# EAGLE board mosfet-drv-for-draft (EAGLE 6.5.0)

Size 100 x 80 mm. Coordinates in mm from the lower left corner, seen from the top.
Outline: 0,0 100,0 100,80 0,80 0,0
Copper layers (1*16): Top 0.035mm / dielectric 1.5mm / Bottom 0.035mm
Design rules "default": minimum track width 10mil, minimum drill 32mil, track to track 16mil, track to pad 16mil, pad to pad 16mil, via to via 16mil, smd to smd 12mil, copper to edge 40mil, drill to drill 40mil, minimum pad ring 25mil, minimum via ring 12mil, stop-mask expansion 4mil, vias tented up to drill 0mil, thermal gap 10mil

## Footprints (pad centres in the part's own frame; a part is rotated, then mirrored left to right if it is on the bottom)
C025-060X050 = drill 0.813 octagon: 1 -1.27,0; 2 1.27,0
78XXS = drill 1.016 long: GND 0,-2.54; IN -2.54,-2.54; OUT 2.54,-2.54
DIL08 = drill 0.8 pad 1.4: 1 -3.81,-3.81; 2 -1.27,-3.81; 3 1.27,-3.81; 4 3.81,-3.81; 5 3.81,3.81; 6 1.27,3.81; 7 -1.27,3.81; 8 -3.81,3.81
1X01 = drill 1.5 long: 1 0,0
2X08 = drill 1.016 octagon: 1 -8.89,-1.27; 2 -8.89,1.27; 3 -6.35,-1.27; 4 -6.35,1.27; 5 -3.81,-1.27; 6 -3.81,1.27; 7 -1.27,-1.27; 8 -1.27,1.27; 9 1.27,-1.27; 10 1.27,1.27; 11 3.81,-1.27; 12 3.81,1.27; 13 6.35,-1.27; 14 6.35,1.27; 15 8.89,-1.27; 16 8.89,1.27
DIL08' = drill 0.813 offset: 1 -3.81,-3.81; 2 -1.27,-3.81; 3 1.27,-3.81; 4 3.81,-3.81; 5 3.81,3.81; 6 1.27,3.81; 7 -1.27,3.81; 8 -3.81,3.81
DIL06 = drill 0.813 offset: 1 -2.54,-3.81; 2 0,-3.81; 3 2.54,-3.81; 4 2.54,3.81; 5 0,3.81; 6 -2.54,3.81
TO220BH = drill 1.118 long: D 0,-6.35; G -2.54,-6.35; S 2.54,-6.35 | hole 3.302: 0,11.176
M1206 = smd 1.6 x 2: 1 -1.4,0; 2 1.4,0
0207/15 = drill 0.813 octagon: 1 -7.62,0; 2 7.62,0

## Placement (x,y rotation side)
C78-IN1  [C025-060X050]  -64.77,66.04 0 top  (outside the outline)
C78-IN2  [C025-060X050]  -73.66,66.04 0 top  (outside the outline)
C78-OUT1  [C025-060X050]  -45.72,66.04 0 top  (outside the outline)
C78-OUT2  [C025-060X050]  -55.88,66.04 0 top  (outside the outline)
IC7805  [78XXS]  -82.55,69.85 0 top  (outside the outline)
ICD1  IR4427  [DIL08]  77.47,31.75 180 top
ICD2  IR4427  [DIL08]  77.47,48.26 0 top
ICD-3-4  IR4427  [DIL08]  35.56,34.29 180 top
ICD-5-6  IR4427  [DIL08]  15.24,33.02 270 top
ICD-7-8  IR4427  [DIL08]  27.94,49.53 90 top
JP_CH1  [1X01]  99.06,2.54 270 top
JP_CH2  [1X01]  96.52,77.47 0 top
JP_CH3  [1X01]  35.56,1.27 0 top
JP_CH4  [1X01]  21.59,1.27 0 top
JP_CH5  [1X01]  7.62,1.27 0 top
JP_CH6  [1X01]  12.7,77.47 0 top
JP_CH7  [1X01]  26.67,77.47 0 top
JP_CH8  [1X01]  40.64,77.47 0 top
JP_MC  [2X08]  -99.06,66.04 0 top  (outside the outline)
JP_PWR_GND  [1X01]  -25.4,74.93 0 top  (outside the outline)
JP_PWR_VCC  [1X01]  -40.64,74.93 0 top  (outside the outline)
OPTO1  6N137  [DIL08']  92.71,33.02 270 top
OPTO2  6N137  [DIL08']  92.71,46.99 90 top
OPTO3  4N25M  [DIL06]  -17.78,55.88 0 top  (outside the outline)
OPTO4  4N25M  [DIL06]  -27.94,55.88 0 top  (outside the outline)
OPTO5  4N25M  [DIL06]  -38.1,55.88 0 top  (outside the outline)
OPTO6  4N25M  [DIL06]  -48.26,55.88 0 top  (outside the outline)
OPTO7  4N25M  [DIL06]  -58.42,55.88 0 top  (outside the outline)
OPTO8  4N25M  [DIL06]  -68.58,55.88 0 top  (outside the outline)
Q1  IRLZ44Z  [TO220BH]  21.59,2.54 180 top
Q1-1  IRLZ44Z  [TO220BH]  91.44,2.54 180 top
Q1-2  IRLZ44Z  [TO220BH]  77.47,2.54 180 top
Q1-3  IRLZ44Z  [TO220BH]  63.5,2.54 180 top
Q1-4  IRLZ44Z  [TO220BH]  49.53,2.54 180 top
Q2  IRLZ44Z  [TO220BH]  7.62,2.54 180 top
Q2-1  IRLZ44Z  [TO220BH]  96.52,77.47 0 top
Q2-2  IRLZ44Z  [TO220BH]  82.55,77.47 0 top
Q2-3  IRLZ44Z  [TO220BH]  68.58,77.47 0 top
Q2-4  IRLZ44Z  [TO220BH]  54.61,77.47 0 top
Q3  IRLZ44Z  [TO220BH]  35.56,2.54 180 top
Q4  IRLZ44Z  [TO220BH]  12.7,77.47 0 top
Q5  IRLZ44Z  [TO220BH]  26.67,77.47 0 top
Q6  IRLZ44Z  [TO220BH]  40.64,77.47 0 top
R-MC1  [M1206]  67.31,40.64 180 bottom
R-MC2  [M1206]  -49.53,80.01 0 top  (outside the outline)
R-MC3  [M1206]  -67.31,80.01 0 top  (outside the outline)
R-MC4  [M1206]  -85.09,80.01 0 top  (outside the outline)
R-MC5  [M1206]  -102.87,80.01 0 top  (outside the outline)
R-MC6  [M1206]  -21.59,85.09 0 top  (outside the outline)
R-MC7  [M1206]  -39.37,85.09 0 top  (outside the outline)
R-MC8  [M1206]  -57.15,85.09 0 top  (outside the outline)
RG1-1  [0207/15]  99.06,16.51 270 top
RG1-2  [0207/15]  96.52,16.51 270 top
RG1-3  [0207/15]  85.09,16.51 270 top
RG1-4  [0207/15]  82.55,16.51 270 top
RG1-5  [0207/15]  71.12,16.51 270 top
RG1-6  [0207/15]  68.58,16.51 270 top
RG1-7  [0207/15]  57.15,16.51 270 top
RG1-8  [0207/15]  54.61,16.51 270 top
RG2-1  [0207/15]  88.9,63.5 90 top
RG2-2  [0207/15]  91.44,63.5 90 top
RG2-3  [0207/15]  77.47,63.5 90 top
RG2-4  [0207/15]  74.93,63.5 90 top
RG2-5  [0207/15]  63.5,63.5 90 top
RG2-6  [0207/15]  60.96,63.5 90 top
RG2-7  [0207/15]  49.53,63.5 90 top
RG2-8  [0207/15]  46.99,63.5 90 top
RG3-1  [0207/15]  40.64,16.51 270 top
RG3-2  [0207/15]  43.18,16.51 270 top
RG4-1  [0207/15]  29.21,16.51 270 top
RG4-2  [0207/15]  26.67,16.51 270 top
RG5-1  [0207/15]  12.7,16.51 270 top
RG5-2  [0207/15]  15.24,16.51 270 top
RG6-1  [0207/15]  5.08,63.5 90 top
RG6-2  [0207/15]  7.62,63.5 90 top
RG7-1  [0207/15]  19.05,63.5 90 top
RG7-2  [0207/15]  21.59,63.5 90 top
RG8-1  [0207/15]  35.56,63.5 90 top
RG8-2  [0207/15]  33.02,63.5 90 top
RO1  [M1206]  -39.37,110.49 0 top  (outside the outline)
RO2  [M1206]  -57.15,110.49 0 top  (outside the outline)
RO3  [M1206]  -74.93,110.49 0 top  (outside the outline)
RO4  [M1206]  -92.71,110.49 0 top  (outside the outline)
RO5  [M1206]  -110.49,110.49 0 top  (outside the outline)
RO6  [M1206]  -21.59,115.57 0 top  (outside the outline)
RO7  [M1206]  -39.37,115.57 0 top  (outside the outline)
RO8  [M1206]  -57.15,115.57 0 top  (outside the outline)

## Library data of the parts
C78-IN1 C78-IN2 C78-OUT1 C78-OUT2 R-MC1-R-MC8 RG1-1-RG1-8 RG2-1-RG2-8 RG3-1 RG3-2 RG4-1 RG4-2 RG5-1 RG5-2 RG6-1 RG6-2 RG7-1 RG7-2 RG8-1 RG8-2 RO1-RO8 = rcl
IC7805 = v-reg
ICD1 ICD2 ICD-3-4 ICD-5-6 ICD-7-8 = ir; MF: INTERNATIONAL RECTIFIER(IR); MPN: IR4427; OC_FARNELL: 1023267; OC_NEWARK: 27C6914
JP_CH1-JP_CH8 JP_PWR_GND JP_PWR_VCC = dbg-misc
JP_MC = pinhead
OPTO1 OPTO2 = optocoupler; MPN: 6N137; OC_FARNELL: 1328376; OC_NEWARK: 52M1895
OPTO3-OPTO8 = optocoupler; MPN: 4N25-M; OC_FARNELL: 1021349; OC_NEWARK: 98K9084
Q1 Q1-1-Q1-4 Q2 Q2-1-Q2-4 Q3-Q6 = transistor-power

## Nets
N$1: C78-IN1.2 C78-IN2.2 C78-OUT1.2 C78-OUT2.2 IC7805.GND ICD1.3 ICD2.3 ICD-3-4.3 ICD-5-6.3 ICD-7-8.3 JP_PWR_GND.1 OPTO1.5 OPTO2.5 OPTO3.4 OPTO4.4 OPTO5.4 OPTO6.4 OPTO7.4 OPTO8.4 Q1-1.S Q1-2.S Q1-3.S Q1-4.S Q1.S Q2-1.S Q2-2.S Q2-3.S Q2-4.S Q2.S Q3.S Q4.S Q5.S Q6.S
N$2: C78-IN1.1 C78-IN2.1 IC7805.IN ICD1.6 ICD2.6 ICD-3-4.6 ICD-5-6.6 ICD-7-8.6 JP_PWR_VCC.1
N$3: C78-OUT1.1 C78-OUT2.1 IC7805.OUT OPTO1.8 OPTO2.8 RO1.2 RO2.2 RO3.2 RO4.2 RO5.2 RO6.2 RO7.2 RO8.2
N$4: OPTO1.2 R-MC1.2
N$5: OPTO2.2 R-MC2.2
N$6: OPTO3.1 R-MC3.2
N$7: OPTO4.1 R-MC4.2
N$8: OPTO5.1 R-MC5.2
N$9: OPTO6.1 R-MC6.2
N$10: OPTO7.1 R-MC7.2
N$11: OPTO8.1 R-MC8.2
N$12: JP_MC.2 R-MC1.1
N$13: JP_MC.4 R-MC2.1
N$14: JP_MC.6 R-MC3.1
N$15: JP_MC.8 R-MC4.1
N$16: JP_MC.10 R-MC5.1
N$17: JP_MC.12 R-MC6.1
N$18: JP_MC.14 R-MC7.1
N$19: JP_MC.16 R-MC8.1
N$20: ICD1.2 ICD1.4 OPTO1.6 RO1.1
N$21: JP_MC.15 OPTO1.3 OPTO2.3 OPTO3.2 OPTO4.2 OPTO5.2 OPTO6.2 OPTO7.2 OPTO8.2
N$22: ICD2.2 ICD2.4 OPTO2.6 RO2.1
N$23: ICD-3-4.2 OPTO3.6 RO3.1
N$24: ICD-3-4.4 OPTO4.6 RO4.1
N$25: ICD-5-6.2 OPTO5.6 RO5.1
N$26: ICD-5-6.4 OPTO6.6 RO6.1
N$27: ICD-7-8.2 OPTO7.6 RO7.1
N$28: ICD-7-8.4 OPTO8.6 RO8.1
N$29: Q1-1.G RG1-1.2 RG1-2.2
N$30: ICD1.5 ICD1.7 RG1-1.1 RG1-2.1 RG1-3.1 RG1-4.1 RG1-5.1 RG1-6.1 RG1-7.1 RG1-8.1
N$31: Q1-2.G RG1-3.2 RG1-4.2
N$32: Q1-3.G RG1-5.2 RG1-6.2
N$33: Q1-4.G RG1-7.2 RG1-8.2
N$34: Q2-1.G RG2-1.2 RG2-2.2
N$35: JP_CH1.1 Q1-1.D Q1-2.D Q1-3.D Q1-4.D
N$37: ICD2.5 ICD2.7 RG2-1.1 RG2-2.1 RG2-3.1 RG2-4.1 RG2-5.1 RG2-6.1 RG2-7.1 RG2-8.1
N$38: Q2-2.G RG2-3.2 RG2-4.2
N$39: Q2-3.G RG2-5.2 RG2-6.2
N$40: Q2-4.G RG2-7.2 RG2-8.2
N$41: JP_CH2.1 Q2-1.D Q2-2.D Q2-3.D Q2-4.D
N$42: JP_CH3.1 Q3.D
N$43: ICD-3-4.7 RG3-1.1 RG3-2.1
N$44: Q3.G RG3-1.2 RG3-2.2
N$45: ICD-3-4.5 RG4-1.1 RG4-2.1
N$46: Q1.G RG4-1.2 RG4-2.2
N$47: JP_CH4.1 Q1.D
N$49: ICD-7-8.5 RG8-1.1 RG8-2.1
N$50: ICD-5-6.7 RG5-1.1 RG5-2.1
N$51: Q2.G RG5-1.2 RG5-2.2
N$52: JP_CH5.1 Q2.D
N$53: ICD-7-8.7 RG7-1.1 RG7-2.1
N$54: ICD-5-6.5 RG6-1.1 RG6-2.1
N$55: Q4.G RG6-1.2 RG6-2.2
N$56: JP_CH6.1 Q4.D
N$57: Q6.G RG8-1.2 RG8-2.2
N$58: JP_CH8.1 Q6.D
N$59: Q5.G RG7-1.2 RG7-2.2
N$60: JP_CH7.1 Q5.D

## Tracks (layer width: path | path; a pad name or v marks a point on that pad's centre or on a via)
N$1  (32 unrouted)
N$2  (8 unrouted)
N$3  (12 unrouted)
N$4  (1 unrouted)
N$5  (1 unrouted)
N$6  (1 unrouted)
N$7  (1 unrouted)
N$8  (1 unrouted)
N$9  (1 unrouted)
N$10  (1 unrouted)
N$11  (1 unrouted)
N$12  (1 unrouted)
N$13  (1 unrouted)
N$14  (1 unrouted)
N$15  (1 unrouted)
N$16  (1 unrouted)
N$17  (1 unrouted)
N$18  (1 unrouted)
N$19  (1 unrouted)
N$20  (3 unrouted)
N$21  (8 unrouted)
N$22  (3 unrouted)
N$23  (2 unrouted)
N$24  (2 unrouted)
N$25  (2 unrouted)
N$26  (2 unrouted)
N$27  (2 unrouted)
N$28  (2 unrouted)
N$29  (2 unrouted)
N$30  (9 unrouted)
N$31  (2 unrouted)
N$32  (2 unrouted)
N$33  (2 unrouted)
N$34  (2 unrouted)
N$35  (4 unrouted)
N$37  (9 unrouted)
N$38  (2 unrouted)
N$39  (2 unrouted)
N$40  (2 unrouted)
N$41  (4 unrouted)
N$42  (1 unrouted)
N$43  (2 unrouted)
N$44  (2 unrouted)
N$45  (2 unrouted)
N$46  (2 unrouted)
N$47  (1 unrouted)
N$49  (2 unrouted)
N$50  (2 unrouted)
N$51  (2 unrouted)
N$52  (1 unrouted)
N$53  (2 unrouted)
N$54  (2 unrouted)
N$55  (2 unrouted)
N$56  (1 unrouted)
N$57  (2 unrouted)
N$58  (1 unrouted)
N$59  (2 unrouted)
N$60  (1 unrouted)